# Altium PCB Grove - Vibration Sensor (SW-420) v1.1.PcbDoc
Units mil, origin at the board's own origin, x right, y up, seen from the top; angles counter-clockwise.
Board outline 2437.42 x 1044.49 mil, 2 copper layers (Top, Bottom); 24 components, 10 nets, 45 pads, 46 vias.
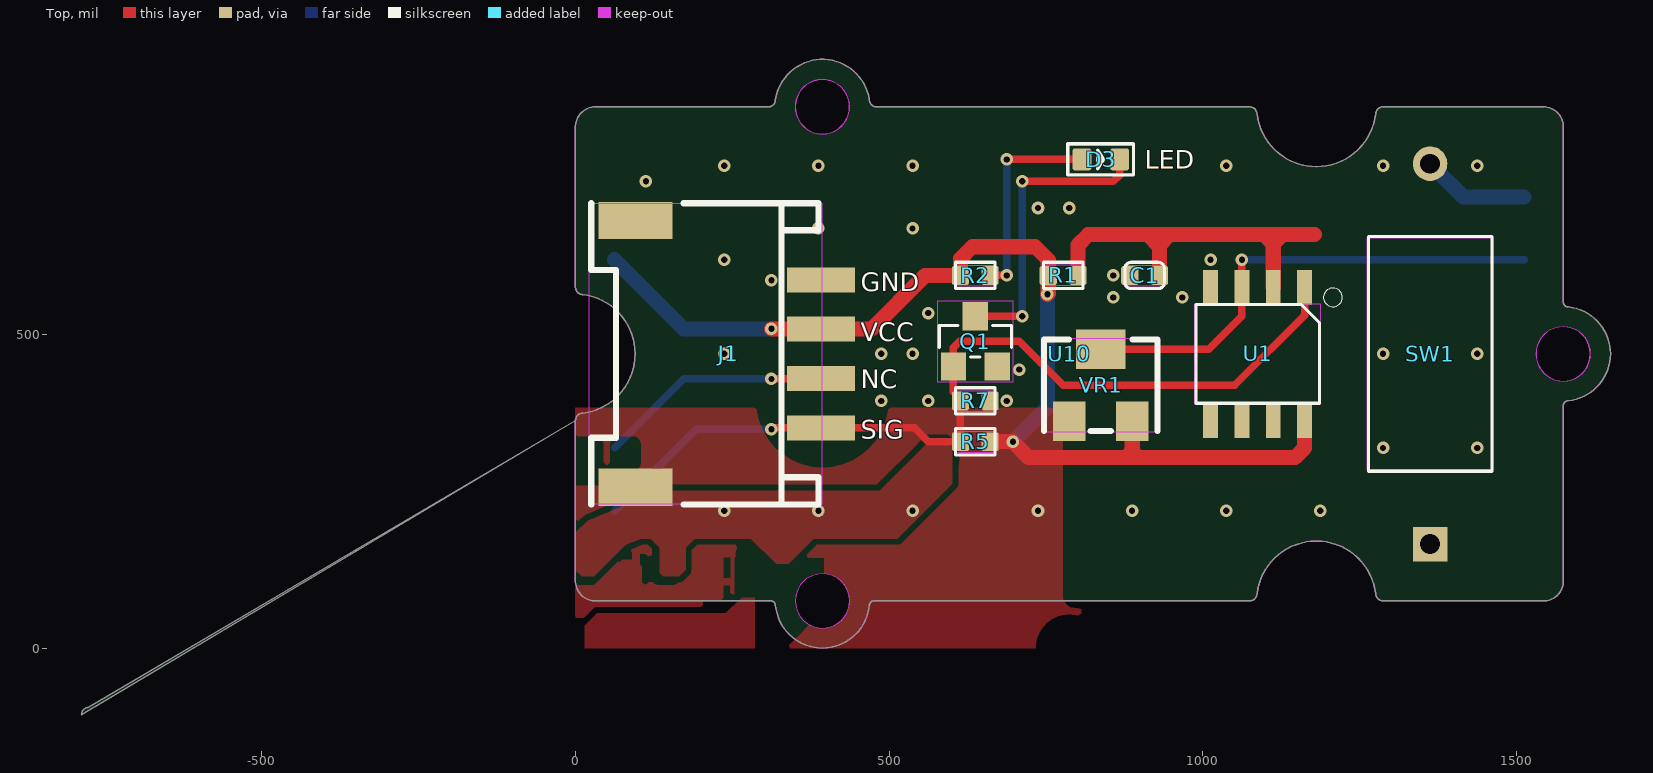
[diagram p0: Top view]
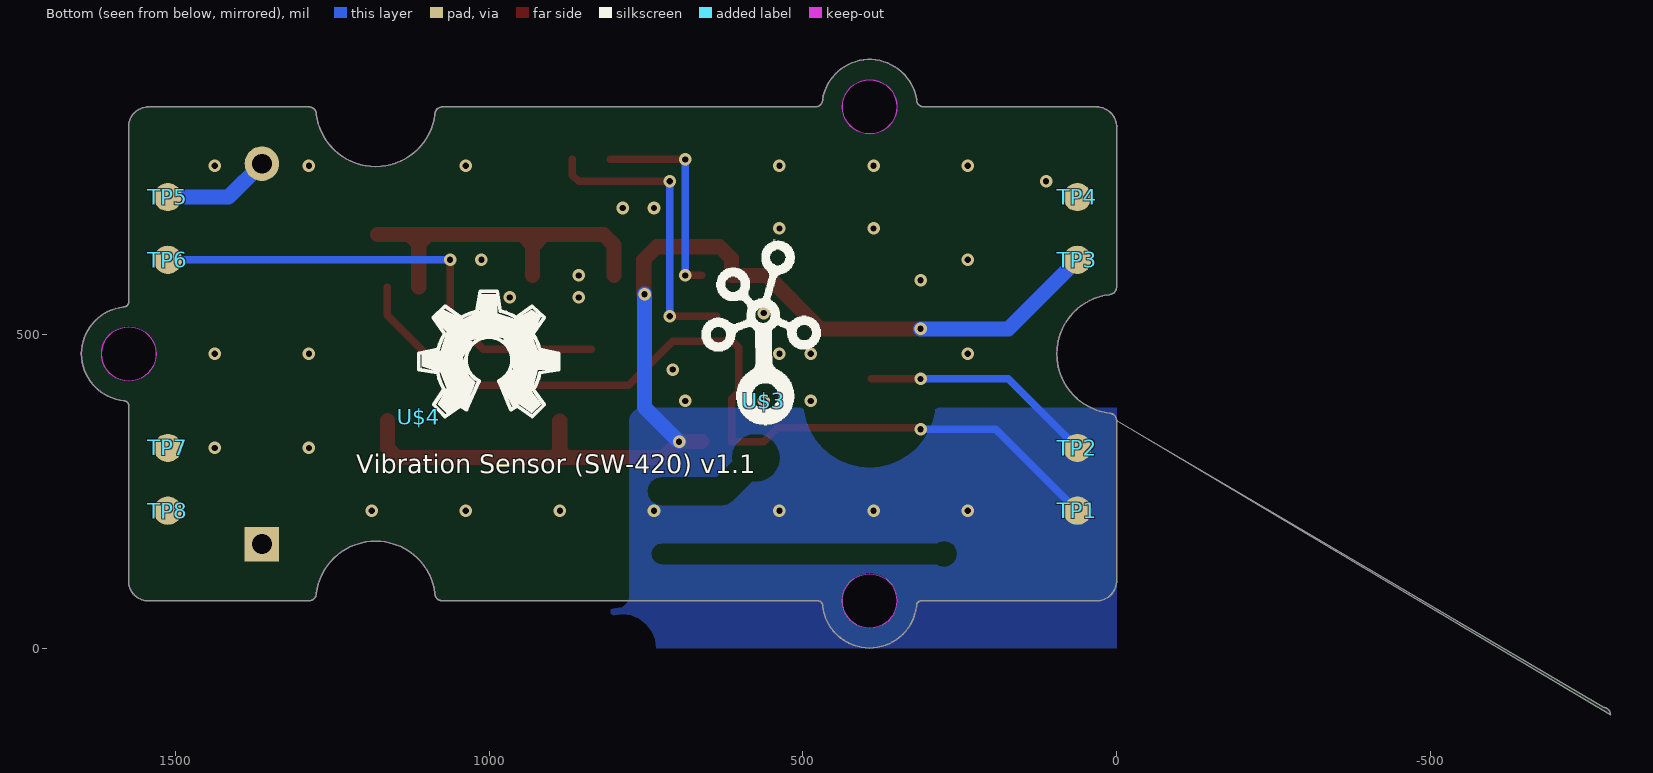
[diagram p1: Bottom view, seen from below]

## Layer stack, top to bottom
Top Solder: solder mask 0.4, Solder Resist, Dk 3.5
Top: signal copper 1.378
Dielectric 1: dielectric 12.6, FR-4, Dk 4.8
Bottom: signal copper 1.378
Bottom Solder: solder mask 0.4, Solder Resist, Dk 3.5

## Board outline
0,362.61 cw(c11.81,362.61) 11.81,374.42 ccw(c0,468.91) 11.81,563.4 cw(c11.81,575.21) 0,575.21 0,831.11 cw(c31.5,831.11) 31.49,862.61 307.08,862.61 ccw(c307.08,874.42) 318.9,874.42 cw(c393.7,862.61) 468.5,874.42 ccw(c480.31,874.42) 480.31,862.61 1074.8,862.61 cw(c1074.8,850.8) 1086.61,850.8 ccw(c1181.1,862.61) 1275.59,850.8 cw(c1287.4,850.8) 1287.4,862.61 1543.31,862.61 cw(c1543.31,831.11) 1574.8,831.11 1574.8,551.59 ccw(c1582.68,551.59) 1582.68,543.71 cw(c1574.81,468.91) 1582.68,394.11 ccw(c1582.68,386.23) 1574.8,386.23 1574.8,106.71 cw(c1543.31,106.7) 1543.31,75.21 1287.4,75.21 cw(c1287.4,87.02) 1275.59,87.02 ccw(c1181.1,75.21) 1086.61,87.02 cw(c1074.8,87.02) 1074.8,75.21 476.38,75.21 ccw(c476.38,67.33) 468.5,67.34 cw(c393.7,75.21) 318.9,67.34 ccw(c311.02,67.33) 311.02,75.21 31.49,75.21 cw(c31.5,106.7) 0,106.71 0,362.61 ccw(c-775.59,-106.3)
cut-out: 1574.4,425.6 ccw(c1574.4,468.91) 1617.71,468.91 ccw(c1574.4,468.91) 1574.4,512.22 ccw(c1574.4,468.91) 1531.09,468.91 ccw(c1574.4,468.91)
cut-out: 393.4,819.6 ccw(c393.4,862.91) 436.71,862.91 ccw(c393.4,862.91) 393.4,906.22 ccw(c393.4,862.91) 350.09,862.91 ccw(c393.4,862.91)
cut-out: 1574.8,425.6 ccw(c1574.8,468.91) 1618.11,468.91 ccw(c1574.8,468.91) 1574.8,512.21 ccw(c1574.8,468.91) 1531.49,468.91 ccw(c1574.8,468.91)
cut-out: 393.7,819.3 ccw(c393.7,862.61) 437,862.61 ccw(c393.7,862.61) 393.7,905.91 ccw(c393.7,862.61) 350.39,862.61 ccw(c393.7,862.61)
cut-out: 393.7,31.9 ccw(c393.7,75.21) 437,75.21 ccw(c393.7,75.21) 393.7,118.51 ccw(c393.7,75.21) 350.39,75.21 ccw(c393.7,75.21)

## Design rules (kind name [scope] priority, off if disabled: settings)
BoardOutlineClearance mdCopperDimension [All] p1: gap=10 ignorepadtopadclearanceinfootprint=FALSE except(0: Arc-SplitContinuation Track-SplitContinuation SMDPad-SplitContinuation THPad-SplitContinuation Via-SplitContinuation Fill-SplitContinuation Poly-SplitContinuation Region-SplitContinuation Text-SplitContinuation)
Clearance Clearance_for_PolygonClass_Isolate_10 [InPolygonClass('Isolate_10') vs IsArc Or IsTrack Or IsPad Or IsVia Or IsFill Or IsRegion Or IsText] p1: gap=10 ignorepadtopadclearanceinfootprint=FALSE
Clearance "Clearance (Same Net)" [All] p2: gap=5 ignorepadtopadclearanceinfootprint=FALSE
Clearance Clearance_for_NetClass_none3 [InNetClass('none3') vs InNetClass('none3')] p3: gap=8 ignorepadtopadclearanceinfootprint=FALSE
Clearance [All] p4: gap=5 ignorepadtopadclearanceinfootprint=FALSE
HoleSize HoleSize_For_NetClass_none3 [InNetClass('none3')] p1: absolutevalues=TRUE maxlimit=12 minlimit=12 maxpercent=80.000 minpercent=20.000
HoleSize HoleSize_For_NetClass_none1 [InNetClass('none1')] p2: absolutevalues=TRUE maxlimit=0 minlimit=0 maxpercent=80.000 minpercent=20.000
HoleSize [All] p3: absolutevalues=TRUE maxlimit=100000 minlimit=8 maxpercent=80.000 minpercent=20.000
HoleToHoleClearance mdDrill [All] p1: gap=10 allowstackedmicrovias=TRUE
MinimumSolderMaskSliver [All] p1 off: minsoldermaskwidth=10
PasteMaskExpansion Expansion_SMDPaste_OFF [InPadClass('SMDPaste_OFF')] p1: expansion=0
PasteMaskExpansion mlMinCreamFrame [All] p2: expansion=0
PolygonConnect PolygonConnect_For_PolygonThermal_OFF [InPolygonClass('PolygonThermal_OFF')] p1: connectstyle=Direct reliefconductorwidth=10 reliefentries=4 polygonreliefangle="90 Angle" airgapwidth=10
PolygonConnect PolygonConnect_For_PolygonThermal_ON_Width120000_Gap100000 [InPolygonClass('PolygonThermal_ON_Width120000_Gap100000') vs Not IsVia] p2: connectstyle=Relief reliefconductorwidth=12 reliefentries=4 polygonreliefangle="90 Angle" airgapwidth=10
PolygonConnect ThermalVias [IsVia] p3: connectstyle=Direct reliefconductorwidth=10 reliefentries=4 polygonreliefangle="90 Angle" airgapwidth=10
PolygonConnect [All] p4: connectstyle=Relief reliefconductorwidth=10 reliefentries=4 polygonreliefangle="90 Angle" airgapwidth=10
RoutingVias [All] p1: holewidth=8 width=16 viastyle="Through Hole" minholewidth=8 minwidth=16 maxholewidth=100 maxwidth=100
SolderMaskExpansion mlMinStopFrame [All] p1: expansion=2
Width Width_For_NetClass_none3 [InNetClass('none3')] p1: maxlimit=10 minlimit=8 preferedwidth=8
Width Width_For_NetClass_none1 [InNetClass('none1')] p2: maxlimit=10 minlimit=99999 preferedwidth=0 toplayer_minwidth=0 bottomlayer_minwidth=0
Width [All] p3: maxlimit=10000 minlimit=1 preferedwidth=1
26 further rules are at their usual default settings.

## Classes and differential pairs
polygon class PolygonThermal_OFF: Polygon_1_Net_N$1 Polygon_1_Net_N$2 Polygon_3_Net_GND
polygon class PolygonThermal_ON_Width120000_Gap100000: Polygon_1_Net_GND Polygon_2_Net_GND
polygon class Isolate_10: Polygon_1_Net_GND Polygon_1_Net_N$1 Polygon_1_Net_N$2 Polygon_2_Net_GND Polygon_3_Net_GND
pad class SMDPaste_OFF: TP1-T TP2-T TP3-T TP4-T TP5-T TP6-T TP7-T TP8-T

## Components (designator, comment, footprint, x,y, rotation, side; value= is the part's Value field where it differs from the comment)
C1 "100nF" C0603 907.4,593.91 r90 top
D3 "RED" LED-0603 837.4,778.91 r180 top
FR2 "" SEEEDSTUDIO-PCB-FRAME -22.6,-296.09 r0 top
FR3 "" SEEEDSTUDIO-PCB-FRAME -12.6,-576.09 r0 top
J1 "SMD Grove 90D" HW4-SMD-2.0-90D 387.4,468.91 r90 top
Q1 "2N7002PW" SOT-23 637.4,488.91 r0 top
R1 "10K" R0603 777.4,593.91 r270 top
R2 "4.7K" R0603 637.4,593.91 r90 top
R5 "10K" R0603 637.4,328.91 r90 top
R7 "470K" R0603 637.4,393.91 r90 top
SW1 "SW-420" SW2-10.0-5X10MM 1362.4,468.91 r90 top
TP1 "" TP-D45MIL 62.4,218.91 r180 bottom
TP2 "" TP-D45MIL 62.4,318.91 r180 bottom
TP3 "" TP-D45MIL 62.4,618.91 r180 bottom
TP4 "" TP-D45MIL 62.4,718.91 r180 bottom
TP5 "" TP-D45MIL 1512.4,718.91 r180 bottom
TP6 "" TP-D45MIL 1512.4,618.91 r180 bottom
TP7 "" TP-D45MIL 1512.4,318.91 r180 bottom
TP8 "" TP-D45MIL 1512.4,218.91 r180 bottom
U1 "LM393" SOIC8-1.27-5X4MM 1087.4,468.91 r180 top
U10 "" GROVE-TEST-PLATFORM 787.4,468.91 r0 top
U$3 "" GROVE-SILK-BIG 562.4,393.91 r180 bottom
U$4 "" OSHW_FILLX200_NOTEXT 1112.4,368.91 r180 bottom
VR1 "10k(301040015)" ADJR3-SMD-4.6X3.7MM 837.4,418.91 r0 top

## Footprints (in the part's own frame and the unit in brackets; to place one, negate y for a bottom-side part, rotate by r counter-clockwise, add the part's x,y. Pads: shape width x height; smd on the part's side, far side on the other; paste and mask are expansions set on the pad)
ADJR3-SMD-4.6X3.7MM [mm] "ADJR3-SMD-4.6X3.7MM"
  rect 1.3x1.6 smd: 1(-1.275,-1.45) 3(1.275,-1.45)
  rect 2x1.6 smd: 2(0,1.45)
  Top keep-out region: -2.286,-1.905 -2.286,1.905 2.286,1.905 2.286,-1.905
  silkscreen extent -2.3,-1.85 2.3,1.85
C0603 [mil] "C0603"
  rrect25% 30x27.4 smd: 1(0,23.7) 2(0,-23.7)
  Top keep-out region: -17.36,-31.65 -17.36,32.09 16.3,32.09 16.3,-31.65
  silkscreen extent -21,-32 21,32
GROVE-SILK-BIG [mil] "GROVE-SILK-BIG"
  silkscreen extent -98,-38 91,257
GROVE-TEST-PLATFORM [mil] "GROVE-TEST-PLATFORM"
HW4-SMD-2.0-90D [mm] "HW4-SMD-2.0-90D"
  rect 1.01x2.74 smd: 1(-3,-0.1) 2(-1,-0.1) 3(1,-0.1) 4(3,-0.1)
  rect 1.5x3 smd: SS1(-5.4,7.4) SS2(5.4,7.4)
  Top keep-out region: -6.096,-0.127 -6.096,9.271 6.096,9.271 6.096,-0.127
  silkscreen extent -6.1,0 6.1,9.2
LED-0603 [mil] "LED-0603"
  rrect25% 30x35 smd: +(30,0) -(-30,0)
  Top keep-out region: 50,22.5 50,-22.5 -50,-22.5 -50,22.5
  silkscreen extent -52,-25 52,25
OSHW_FILLX200_NOTEXT [mil] "OSHW_FILLX200_NOTEXT"
  silkscreen extent 0,0 223,200
R0603 [mil] "R0603"
  rrect25% 30x27.4 smd: 1(0,23.7) 2(0,-23.7)
  Top keep-out region: -17.36,-31.65 -17.36,32.09 16.3,32.09 16.3,-31.65
  silkscreen extent -21,-32 21,32
SEEEDSTUDIO-PCB-FRAME [mil] "SEEEDSTUDIO-PCB-FRAME"
SOIC8-1.27-5X4MM [mil] "SOIC8-1.27-5X4MM"
  rect 23.62x55.12 smd: 1(-75,-106.3) 2(-25,-106.3) 3(25,-106.3) 4(75,-106.3) 5(75,106.3) 6(25,106.3) 7(-25,106.3) 8(-75,106.3)
  Top keep-out region: -100,-80 -100,80 100,80 100,-80
  silkscreen extent -135,-105 98,79
SOT-23 [mil] "SOT-23"
  rect 40x45 smd: 1(-35,-40) 2(35,-40) 3(0,40)
  Top keep-out region: -60,-65 -60,65 60,65 60,-65
  silkscreen extent -58,-25 58,25
SW2-10.0-5X10MM [mil] "SW2-10.0-5X10MM"
  rect 55.12x55.12 / inner rect 60x60 / far side rect 55.12x55.12 hole 31.5: 1(-303.15,0)
  round 55.12 / inner round 60 / far side round 55.12 hole 31.5: 2(303.15,0)
  Top keep-out region: -185,-100 -185,100 185,100 185,-100
  silkscreen extent -187,-98 187,98
TP-D45MIL [mil] "TP-D45MIL"
  rrect100% 45x45 smd paste-22.5: T(0,0)

## Part data
C1: library part C0603, PackageName=C0603, OriginalSource=Eagle
D3: library part LED-0603, PackageName=LED-0603, OriginalSource=Eagle
FR2 FR3: library part SEEEDSTUDIO-PCB-FRAME, PackageName=SEEEDSTUDIO-PCB-FRAME, OriginalSource=Eagle
J1: library part HW4-SMD-2.0-90D, PackageName=HW4-SMD-2.0-90D, OriginalSource=Eagle
Q1: library part SOT-23, PackageName=SOT-23, OriginalSource=Eagle
R1 R2 R5 R7: library part R0603, PackageName=R0603, OriginalSource=Eagle
SW1: library part SW2-10.0-5X10MM, PackageName=SW2-10.0-5X10MM, OriginalSource=Eagle
TP1 TP2 TP3 TP4 TP5 TP6 TP7 TP8: library part TP-D45MIL, PackageName=TP-D45MIL, OriginalSource=Eagle
U1: library part SOIC8-1.27-5X4MM, PackageName=SOIC8-1.27-5X4MM, OriginalSource=Eagle
U10: library part GROVE-TEST-PLATFORM, PackageName=GROVE-TEST-PLATFORM, OriginalSource=Eagle
U$3: library part GROVE-SILK-BIG, PackageName=GROVE-SILK-BIG, OriginalSource=Eagle
U$4: library part OSHW_FILLX200_NOTEXT, PackageName=OSHW_FILLX200_NOTEXT, OriginalSource=Eagle
VR1: library part ADJR3-SMD-4.6X3.7MM, PackageName=ADJR3-SMD-4.6X3.7MM, OriginalSource=Eagle

## Free pads (board coordinates)
  round 86.61 hole 86.61 unplated: MH1(393.7,75.21) MH2(393.7,862.61) MH3(1574.8,468.91)

## Via types
v1: diameter 20/20 (per signal layer), hole 10, Top to Bottom, tented both sides, 46 vias

## Nets (pads, with @x,y where several pads share a name; then routed paths per layer and width w, separated by ;. In a path a pad name is that pad's centre, name@x,y a point inside that pad or via, vN(x,y) a via of type N, cw(c..) or ccw(c..) an arc to the next point about the centre after c; other vN are vias at no path point)
E_GND: 
GND: C1.1 J1.4 J1.SS1 J1.SS2 Q1.2 R7.2 SW1.1 TP4.T U1.4 VR1.1
  other v1: 237.4,218.91 387.4,218.91 537.4,218.91 737.4,218.91 887.4,218.91 1037.4,218.91 1187.4,218.91 1287.4,318.91 1437.4,318.91 487.4,393.91 562.4,393.91 687.4,393.91 707.4,443.91 237.4,468.91 487.4,468.91 537.4,468.91 1287.4,468.91 1437.4,468.91 562.4,533.91 857.4,558.91 967.4,558.91 312.4,586.41 857.4,593.91 237.4,618.91 1012.4,618.91 387.4,668.91 537.4,668.91 737.4,701.41 787.4,701.41 112.4,743.91 237.4,768.91 387.4,768.91 537.4,768.91 1037.4,768.91 1287.4,768.91 1437.4,768.91
N$1: TP6.T U1.3 VR1.2 | length 786.9
  Top w12: VR1.2 1009.49,476 1062.4,528.91 U1.3 v1(1062.4,618.91)
  Bottom w12: v1(1062.4,618.91) TP6.T
N$2: C1.2 R1.1 SW1.2 TP5.T U1.2 | length 845.5
  Top w24: R1.1 801.1,642.61 817.4,658.91 912.4,658.91 ; C1.2 931.1,640.21 ; U1.2 1112.4,643.91 ; 1177.99,658.91 1127.4,658.91 ; 912.4,658.91 931.1,640.21 ; 912.4,658.91 932.4,658.91 ; 931.1,640.21 931.1,642.61 ; 931.1,642.61 947.4,658.91 ; 931.1,642.61 931.1,657.61 932.4,658.91 ; 932.4,658.91 947.4,658.91 ; 947.4,658.91 1097.4,658.91 ; 1097.4,658.91 1112.4,643.91 ; 1097.4,658.91 1112.4,658.91 ; 1112.4,643.91 1127.4,658.91 ; 1112.4,643.91 1112.4,658.91 ; 1112.4,658.91 1127.4,658.91
  Bottom w24: SW1.2 1415.55,718.91 TP5.T
N$3: D3.+ R2.2 | length 331.3
  Top w12: R2.2 v1(687.4,593.91) ; v1(687.4,778.91) D3.+
  Bottom w12: v1(687.4,593.91) v1(687.4,778.91)
N$4: D3.- Q1.3 | length 474.1
  Top w12: Q1.3 v1(712.4,528.91) ; v1(712.4,743.91) 857.4,743.91 867.4,753.91 D3.-
  Bottom w12: v1(712.4,528.91) v1(712.4,743.91)
N$7: 
NC: J1.2 TP2.T | length 374.8
  Top w12: v1(312.4,428.91) 313.03,429.54 J1.2
  Bottom w12: TP2.T 172.4,428.91 v1(312.4,428.91)
SIG: J1.1 Q1.1 R5.1 R7.1 TP1.T U1.1 | length 1453.6
  Top w12: v1(312.4,348.91) 314.29,350.8 J1.1 540.51,350.8 562.4,328.91 R5.1 R7.1 613.7,397.61 602.4,408.91 Q1.1 602.4,478.91 612.4,488.91 707.4,488.91 777.4,418.91 1050.6,418.91 1162.4,530.71 U1.1
  Bottom w12: TP1.T 192.4,348.91 v1(312.4,348.91)
VCC: J1.3 R1.2 R2.1 R5.2 TP3.T U1.8 VR1.3 | length 1777
  Top w24: v1(312.4,508.91) 313.03,508.28 J1.3 471.77,508.28 557.4,593.91 R2.1 613.7,620.68 632.68,639.66 732.89,639.66 753.7,618.85 R1.2 753.7,565.21 v1(752.4,563.91) ; R5.2 v1(697.4,328.91) 722.4,303.91 877.4,303.91 ; VR1.3 887.6,314.11 ; U1.8 1162.4,318.91 1147.4,303.91 897.4,303.91 ; 877.4,303.91 887.6,314.11 ; 877.4,303.91 887.4,303.91 ; 887.4,303.91 887.6,304.11 887.6,313.71 ; 887.4,303.91 897.4,303.91 ; 887.6,313.71 897.4,303.91 ; 887.6,313.71 887.6,314.11
  Bottom w24: TP3.T 172.4,508.91 v1(312.4,508.91) ; v1(697.4,328.91) 752.4,383.91 v1(752.4,563.91)
pads on no net: TP7.T TP8.T U1.5 U1.6 U1.7

## Polygon pours and split planes (outlines as drawn)
N$1 on Top "Polygon_1_Net_N$1" (solid, remove dead copper, pour order 1): 1052.19,549.41 1027.19,524.41 822.19,524.41 801.9,504.12 801.9,463.7 812.19,453.41 1057.61,453.41 1072.9,468.7 1072.9,549.41
N$2 on Top "Polygon_1_Net_N$2" (solid, remove dead copper, pour order 2): 786.9,593.7 786.9,652.04 806.97,672.1 921.18,719.41 1272.19,719.41 1352.19,799.41 1377.61,799.41 1387.9,789.12 1387.9,731.16 1300.15,643.41 1167.61,643.41 1127.61,603.41 1107.19,603.41 1067.19,643.41 977.61,643.41 962.9,628.7 962.9,593.7 952.61,583.41 927.19,583.41 921.9,588.7 921.9,628.7 907.19,643.41 892,643.41 867.43,633.24 817.61,583.41 797.19,583.41
GND on Top "Polygon_3_Net_GND" (solid, remove dead copper, pour order 0): 882.61,609.41 862.19,609.41 841.9,589.12 841.9,553.7 852.19,543.41 1017.61,543.41 1022.9,548.7 1022.9,624.12 1017.61,629.41 997.19,629.41 986.9,619.12 986.9,584.12 972.19,569.41 897.61,569.41 892.9,574.12 892.9,599.12
GND on Top "Polygon_1_Net_GND" (solid, remove dead copper, pour order 4): -18.6,874.91 1593.4,874.91 1593.4,62.91 -18.6,62.91
GND on Bottom "Polygon_2_Net_GND" (solid, remove dead copper, pour order 3): -18.6,874.91 1593.4,874.91 1593.4,62.91 -18.6,62.91

## Keep-outs
Keep-Out Layer:
  the board outline again, w1

## Silkscreen, mask and mechanical layers (free items; w line width, h text height)
Top Overlay:
  text "LED" at 907.4,763.91 h29.75
  text "GND" at 454.9,568.91 h29.75
  text "VCC" at 454.9,488.91 h29.75
  text "NC" at 454.9,413.91 h29.75
  text "SIG" at 454.9,333.91 h29.75
Bottom Overlay:
  text "Vibration Sensor (SW-420) v1.1" at 1212.4,278.91 h29.75
Dimension:
  circle w1: c1574.4,468.91 r43.31
  circle w1: c393.4,862.91 r43.31
  lines w1: 0,106.71 ccw(c31.5,106.7) 31.49,75.21 311.02,75.21 cw(c311.02,67.33) 318.9,67.34 ccw(c393.7,75.21) 468.5,67.34 cw(c476.38,67.33) 476.38,75.21 1074.8,75.21 ccw(c1074.8,87.02) 1086.61,87.02 cw(c1181.1,75.21) 1275.59,87.02 ccw(c1287.4,87.02) 1287.4,75.21 1543.31,75.21 ccw(c1543.31,106.7) 1574.8,106.71 1574.8,386.23 cw(c1582.68,386.23) 1582.68,394.11 ccw(c1574.81,468.91) 1582.68,543.71 cw(c1582.68,551.59) 1574.8,551.59 1574.8,831.11 ccw(c1543.31,831.11) 1543.31,862.61 1287.4,862.61 ccw(c1287.4,850.8) 1275.59,850.8 cw(c1181.1,862.61) 1086.61,850.8 ccw(c1074.8,850.8) 1074.8,862.61 480.31,862.61 cw(c480.31,874.42) 468.5,874.42 ccw(c393.7,862.61) 318.9,874.42 cw(c307.08,874.42) 307.08,862.61 31.49,862.61 ccw(c31.5,831.11) 0,831.11 0,575.21 ccw(c11.81,575.21) 11.81,563.4 cw(c0,468.91) 11.81,374.42 ccw(c11.81,362.61) 0,362.61 0,106.71
Reference:
  lines w8: 1392.4,863.91 1574.9,863.91 1574.9,731.41

## Text inside footprints (layer, text, board x,y; h text height)
FR2: Top "http://creativecommons.org/licenses/by-sa/4.0/" at -22.6,-296.09 h42.5; Top "To view a copy of this license,visit:" at -22.6,-221.09 h42.5; Top "This work is licensed under the Creative Commons Attribution 4.0 International License." at -22.6,-146.09 h42.5
FR3: Top "http://creativecommons.org/licenses/by-sa/4.0/" at -12.6,-576.09 h42.5; Top "To view a copy of this license,visit:" at -12.6,-501.09 h42.5; Top "This work is licensed under the Creative Commons Attribution 4.0 International License." at -12.6,-426.09 h42.5
U10: Reference "SCK" at 852.4,478.91 h29.75; Reference "MISO" at 852.4,573.91 h29.75; Reference "RST" at 852.4,383.91 h29.75; Reference "VCC" at 717.4,573.91 h29.75; Reference "MOSI" at 717.4,478.91 h29.75; Reference "GND" at 717.4,383.91 h29.75; Reference "READ VOL/GET VOLSIG" at 1637.4,593.91 h29.75; Reference "First Choice" at 112.4,343.91 h42.5; Reference "READ VOL/4" at 1637.4,693.91 h29.75; Reference "READ VOL" at 1637.4,293.91 h29.75; Reference "GND" at 1637.4,218.91 h29.75; Reference "SIG/READ VOL/TX" at -527.6,218.91 h29.75; Reference "SIG/RX" at -237.6,293.91 h29.75; Reference "VCC" at -137.6,593.91 h29.75; Reference "GND" at -137.6,693.91 h29.75; Reference "4P-SMD-2.0" at 1337.4,568.91 h29.75 r90; Reference "4P-2.0" at 1462.4,568.91 h29.75 r90; Reference "4P-SMD-2.0-90D" at 1212.4,568.91 h29.75 r90; Reference "4P-SMD-2.0-90D" at 412.4,568.91 h29.75 r90; Reference "4P-2.0" at 162.4,568.91 h29.75 r90; Reference "4P-SMD-2.0" at 287.4,568.91 h29.75 r90; Reference "TP" at 1662.4,443.91 h29.75 r90; Reference "TP" at -62.6,443.91 h29.75 r90; tDocu "First Choice" at 62.4,-606.09 h42.5; tDocu "4P-SMD-2.0" at 1387.4,-431.09 h29.75 r90; tDocu "4P-2.0" at 1612.4,-356.09 h29.75 r90; tDocu "4P-SMD-2.0-90D" at 1062.4,-481.09 h29.75 r90; tDocu "4P-SMD-2.0-90D" at 587.4,-481.09 h29.75 r90; tDocu "4P-2.0" at 12.4,-356.09 h29.75 r90; tDocu "4P-SMD-2.0" at 237.4,-406.09 h29.75 r90